# Altium PCB Chicker.PcbDoc
Units mil, origin at the board's own origin, x right, y up, seen from the top; angles counter-clockwise.
Board outline 5245 x 2500 mil, 2 copper layers (Top Layer, Bottom Layer); 27 components, 20 nets, 90 pads, 22 vias.
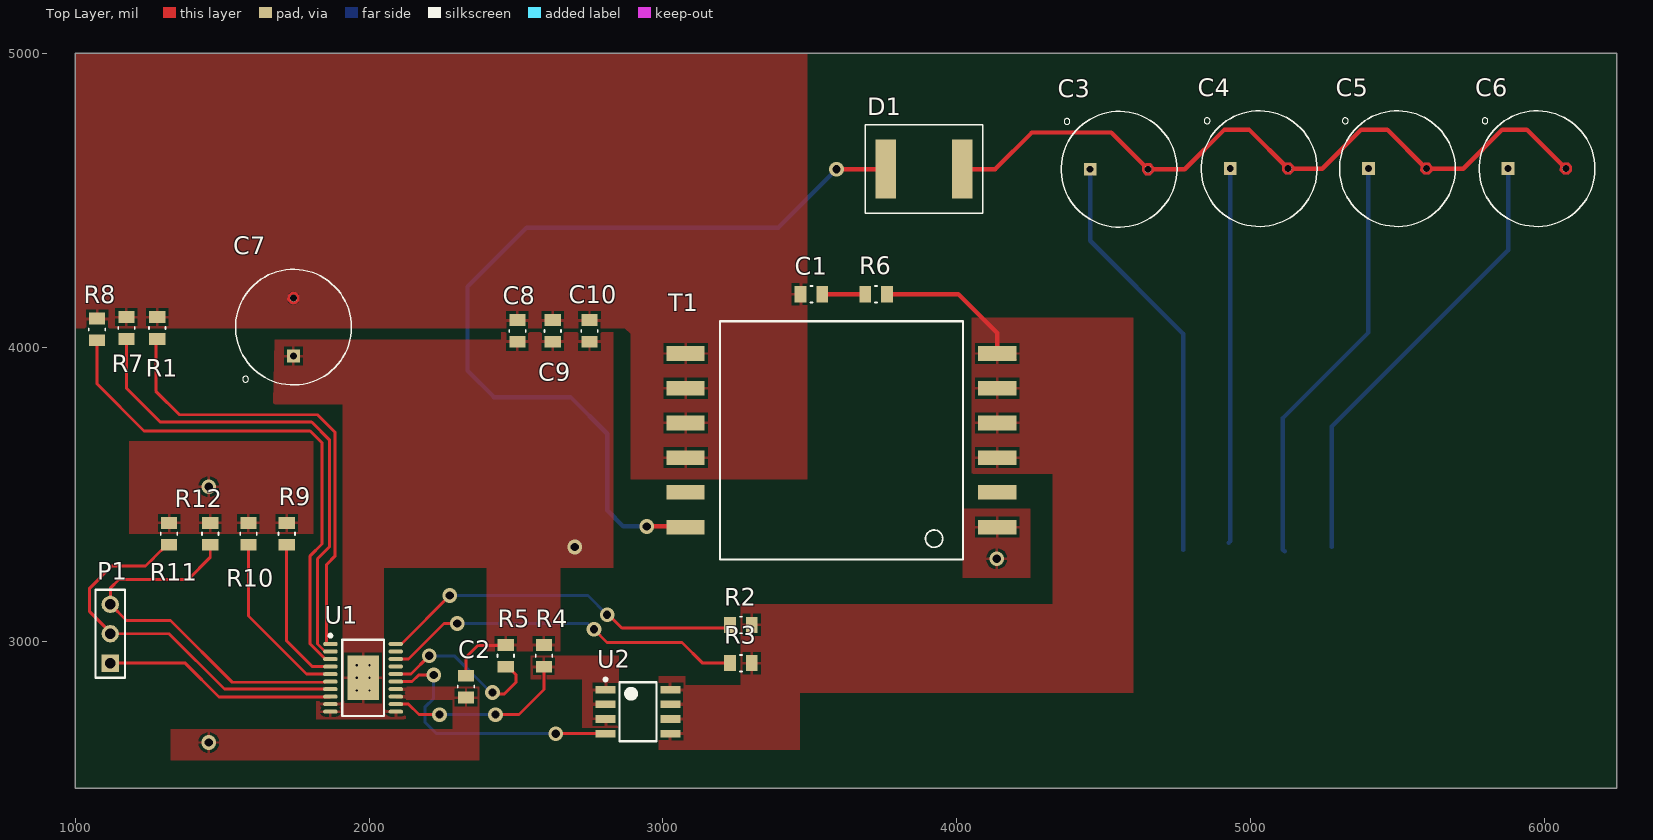
[diagram p0: Top Layer view]
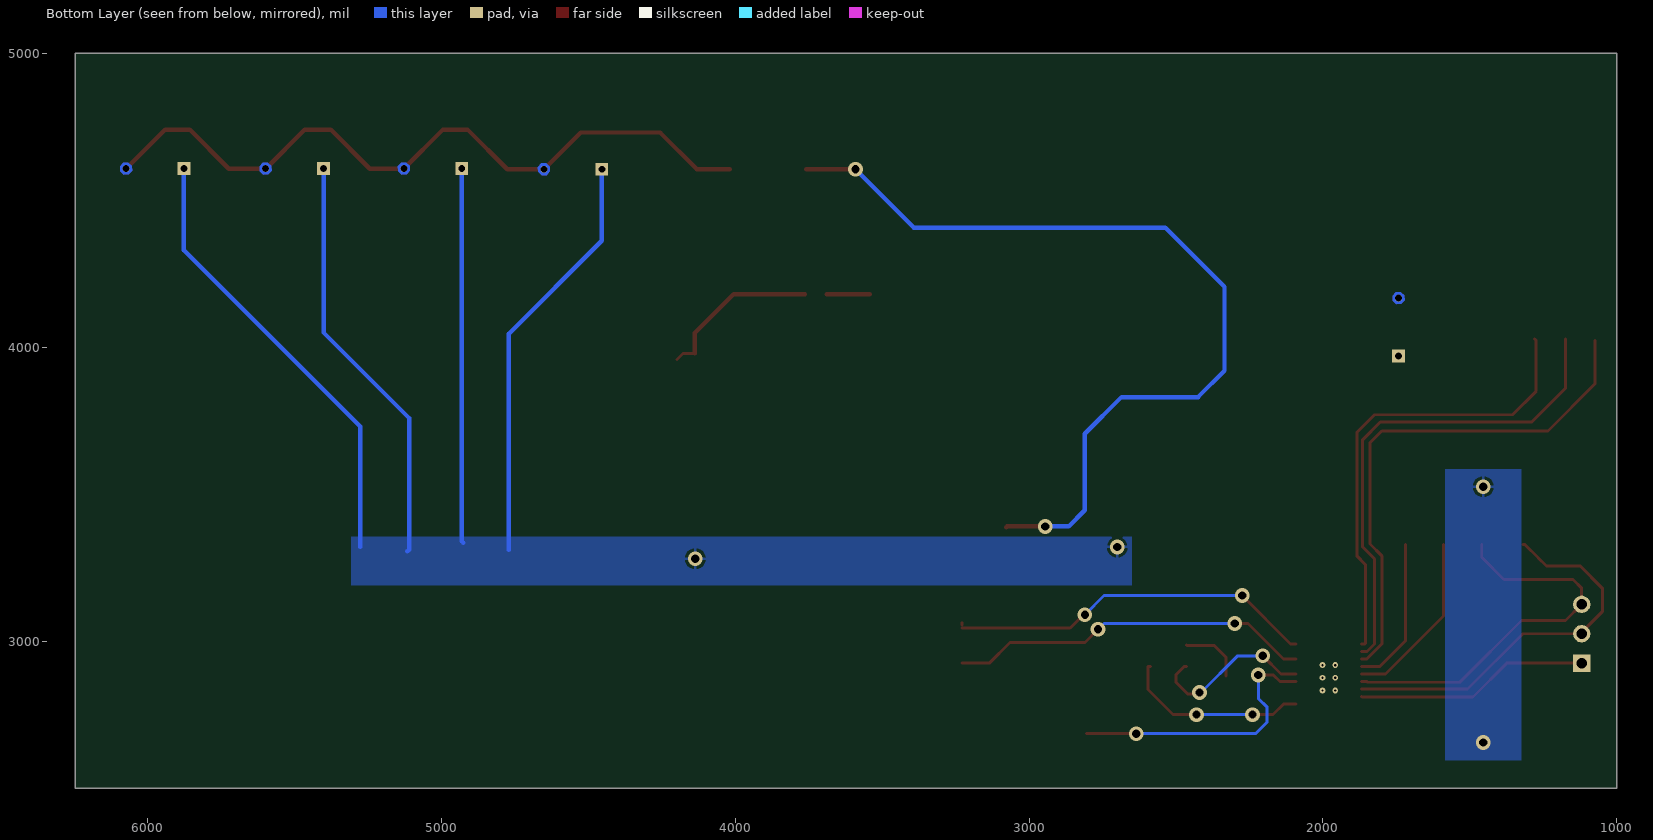
[diagram p1: Bottom Layer view, seen from below]

## Layer stack, top to bottom
Top Solder: solder mask 0.4, Solder Resist, Dk 3.5
Top Layer: signal copper 1.4
Dielectric 1: dielectric 12.6, FR-4, Dk 4.8
Bottom Layer: signal copper 1.4
Bottom Solder: solder mask 0.4, Solder Resist, Dk 3.5

## Board outline
1000,2500 6245,2500 6245,5000 1000,5000

## Design rules (kind name [scope] priority, off if disabled: settings)
Clearance [All] p1: gap=4 ignorepadtopadclearanceinfootprint=FALSE
PolygonConnect [All] p1: connectstyle=Relief reliefconductorwidth=10 reliefentries=4 polygonreliefangle="90 Angle" airgapwidth=10
RoutingVias [All] p1: holewidth=28 width=50 viastyle="Through Hole" minholewidth=28 minwidth=50 maxholewidth=28 maxwidth=50
SolderMaskExpansion [All] p1: expansion=4 istentingtop=FALSE
Width [All] p1: maxlimit=15 minlimit=4 preferedwidth=10
30 further rules are at their usual default settings.

## Components (designator, comment, footprint, x,y, rotation, side; value= is the part's Value field where it differs from the comment)
C1 "2.2uF" 0805 3505,4180 r180 top
C2 "10uF" 0805 2330,2845 r90 top
C3 "1000uF" "CAP POL 1000uF THRU" 4548.57,4603 r0 top
C4 "1000uF" "CAP POL 1000uF THRU" 5025,4605 r0 top
C5 "1000uF" "CAP POL 1000uF THRU" 5495,4605 r0 top
C6 "1000uF" "CAP POL 1000uF THRU" 5970,4605 r0 top
C7 "1000uF" "CAP POL 1000uF THRU" 1745,4065 r90 top
C8 "10uF" 0805 2505,4055 r270 top
C9 "10uF" 0805 2625,4055 r270 top
C10 "10uF" 0805 2750,4055 r270 top
D1 "ES3J" D0214-AB 3885,4610 r0 top
P1 "Header 3" HDR1X3 1120,2925 r90 top
R1 "25.5k" 0805 1280,4065 r270 top
R2 "11.5k" 0805 3265,3055 r180 top
R3 "25.5k" 0805 3265,2925 r180 top
R4 "16m" 0805 2595,2950 r90 top
R5 "1.05k" 0805 2465,2950 r90 top
R6 "100k" 0805 3725,4180 r0 top
R7 "174k" 0805 1175,4065 r90 top
R8 "255k" 0805 1075,4060 r90 top
R9 "374k" 0805 1720,3365 r90 top
R10 "495k" 0805 1590,3365 r90 top
R11 "100k" 0805 1320,3365 r90 top
R12 "100k" 0805 1460,3365 r90 top
T1 "DA2034" DA2034 3590,3705 r180 top
U1 "LT3751EFE#PBF" LT-FE-20-EPV-CB_L 1980,2875 r0 top
U2 "FDS2582" "8-SOIC MOSFET" 2915,2760 r0 top

## Footprints (in the part's own frame and the unit in brackets; to place one, negate y for a bottom-side part, rotate by r counter-clockwise, add the part's x,y. Pads: shape width x height; smd on the part's side, far side on the other; paste and mask are expansions set on the pad)
"8-SOIC MOSFET" [mm]
  rect 1.75x0.65 smd: D(2.8,-1.905) D(2.8,-0.635) D(2.8,0.635) D(2.8,1.905) G(-2.8,-1.905) S(-2.8,-0.635) S(-2.8,0.635) S(-2.8,1.905)
  silkscreen extent -2.92,-2.55 1.6,2.9, body extent -2,-2.55 2,2.55, height 1.7
0805 [mil]
  rect 40x55 smd: 1(-37,0) 2(37,0)
  silkscreen extent -4,-28 4,28
"CAP POL 1000uF THRU" [mm]
  rect 1.108x1.108 hole 0.6: NEG(-2.424,0.051)
  round 0.6 hole 0.6: POS(2.576,0.051)
  Top Layer region: 3.097,0.24 2.81,0.553 2.387,0.571 2.074,0.285 2.056,-0.139 2.342,-0.451 2.766,-0.47 3.078,-0.183
  Bottom Layer region: 3.097,0.24 2.81,0.553 2.387,0.571 2.074,0.285 2.056,-0.139 2.342,-0.451 2.766,-0.47 3.078,-0.183
  Multi-Layer region: 3.097,0.24 2.81,0.553 2.387,0.571 2.074,0.285 2.056,-0.139 2.342,-0.451 2.766,-0.47 3.078,-0.183
  silkscreen extent -4.92,-4.95 5.08,5.05
D0214-AB [mil]
  rect 70x200 smd: IN(-126.89,-4.41) OUT(133.11,-4.41)
  silkscreen extent -197,-154 203,146
DA2034 [mm]
  rect 3.3x1.27 smd: 1(-13.892,8.059) 2(-13.892,5.059) 3(-13.892,2.059) 4(-13.892,-0.941) 5(-13.892,-3.941) 6(-13.892,-6.941) 7(13.028,-6.941) 8(13.028,-3.941) 9(13.028,-0.941) 10(13.028,2.059) 11(13.028,5.059) 12(13.028,8.059)
  silkscreen extent -10.93,-9.73 10.07,10.85
HDR1X3 [mm] "Connector; Header; 3 Position"
  rect 1.5x1.5 hole 0.9: 1(0,0)
  round 1.5 hole 0.9: 2(2.54,0) 3(5.08,0)
  silkscreen extent -1.27,-1.27 6.35,1.27
LT-FE-20-EPV-CB_L [mm] "SOP, 20-Leads, Body 6.6x4.5mm, Pitch 0.65mm, Thermal Pad 3.86x2.74mm, IPC High Density"
  oval 1.25x0.35 smd: 1(-2.825,2.925) 2(-2.825,2.275) 3(-2.825,1.625) 4(-2.825,0.975) 5(-2.825,0.325) 6(-2.825,-0.325) 7(-2.825,-0.975) 8(-2.825,-1.625) 9(-2.825,-2.275) 10(-2.825,-2.925) 11(2.825,-2.925) 12(2.825,-2.275) 13(2.825,-1.625) 14(2.825,-0.975) 15(2.825,-0.325) 16(2.825,0.325) 17(2.825,0.975) 18(2.825,1.625) 19(2.825,2.275) 20(2.825,2.925)
  rect 2.74x3.86 smd: 21(0,0)
  silkscreen extent -2.95,-3.3 1.8,3.77, body extent -2.25,-3.3 2.25,3.3, height 1.2

## Part data
C1: library part "CAP 2.2uF 0805", "CAP CER 1UF 50V X7R 0805", Package=0805, Rating=16V, Tolerance=10%, Digikey=399-3523-1-ND, Digikey Link=https://www.digikey.ca/products/en?keywords=399-3523-1-ND, MF=KEMET, MP=C0805C225K4RACTU, Price="0,461 CAD"
C2 C8 C9 C10: library part "CAP 10uF 0805", "CAP CER 10UF 10V X5R 0805", Package=0805, Rating=10V, Tolerance=10%, Digikey=399-4925-1-ND, Digikey Link=https://www.digikey.ca/product-detail/en/kemet/C0805C106K8PACTU/399-4925-1-ND/1090920, MF=KEMET, MP=C0805C106K8PACTU, Price="0.168 CAD"
C3 C4 C5 C6 C7: library part "CAP POL 1000uF THRU", "NICHICON   UVR1E102MPD1TD   ALUMINUM ELECTROLYTIC CAPACITOR, 1000UF, 25V, 20%, RADIAL, FULL REEL", Capacitance=1mF, Case/Package=Radial, Dielectric Material=Aluminium, Leakage Current=750uA, Manufacturer=Nichicon, Manufacturer Part Number=UVR1E102MPD1TD, Max Operating Temperature=85°C, Min Operating Temperature=-40°C, Package Quantity=500, Ripple Current=960mA, Supplier Part Number 1=493-5913-1-ND, Tolerance=20%, Voltage=25V, Category="Aluminum Electrolytic Capacitors", ComponentLink1Description=https://datasheet.ciiva.com/7851/e-vr-7851718.pdf?src-supplier=Element14, ComponentLink1URL=https://datasheet.ciiva.com/7851/e-vr-7851718.pdf?src-supplier=Element14, ComponentLink2Description=https://datasheet.ciiva.com/6300/e-vr-6300009.pdf?src-supplier=Digi-Key, ComponentLink2URL=https://datasheet.ciiva.com/6300/e-vr-6300009.pdf?src-supplier=Digi-Key, ComponentLink3Description=https://datasheet.ciiva.com/6300/e-vr-6300010.pdf?src-supplier=Digi-Key, ComponentLink3URL=https://datasheet.ciiva.com/6300/e-vr-6300010.pdf?src-supplier=Digi-Key, ComponentLink4Description=https://datasheet.ciiva.com/11684/e-vr-11684106.pdf?src-supplier=Avnet, ComponentLink4URL=https://datasheet.ciiva.com/11684/e-vr-11684106.pdf?src-supplier=Avnet, ComponentLink5Description=https://datasheet.ciiva.com/16502/e-vr-16502813.pdf?src-supplier=Future+Electronics, ComponentLink5URL=https://datasheet.ciiva.com/16502/e-vr-16502813.pdf?src-supplier=Future+Electronics, ComponentLink6Description=https://datasheet.ciiva.com/46381/1909356-46381757.pdf?src-supplier=Element14, ComponentLink6URL=https://datasheet.ciiva.com/46381/1909356-46381757.pdf?src-supplier=Element14, Diameter=10mm, Dissipation Factor=0.16%, Height=20mm, Height - Seated (Max)=0.866inch, Lead Diameter=0.6mm, Lead Free="Lead Free", Lead Pitch=5mm, Length=20mm, Life (Hours)=2000Hour, Mount="Through Hole,PCB", Number of Pins=2, Packaging="Tape and Reel", Pricing 1="1=0.58000, 10=0.40800, 100=0.26890 (USD)", Radiation Hardening=No, REACH SVHC="No SVHC", RoHS=Yes, Stock 1=43448, Supplier 1=Digi-Key, Termination=Radial, Voltage Rating=25V, Voltage Rating (DC)=25V
D1: "Diode Switching 600V 3A 2-Pin DO-214AB T/R", Average Rectified Current=3A, Capacitance=45pF, Case/Package=SMC, Forward Voltage=1.7V, Manufacturer="ON Semiconductor / Fairchild", Max Forward Surge Current (Ifsm)=100A, Max Operating Temperature=150°C, Max Repetitive Reverse Voltage (Vrrm)=600V, Min Operating Temperature=-50°C, Package Quantity=3000, Peak Reverse Current=10uA, Power Dissipation=1.66W, Supplier Part Number 1=ES3JCT-ND, Category="Zener Diodes", ComponentLink1Description=https://datasheet.ciiva.com/4452/es3j-187547-4452440.pdf?src-supplier=Mouser, ComponentLink1URL=https://datasheet.ciiva.com/4452/es3j-187547-4452440.pdf?src-supplier=Mouser, ComponentLink2Description=https://datasheet.ciiva.com/30479/0900766b810e1d0b-30479500.pdf?src-supplier=RSComponents, ComponentLink2URL=https://datasheet.ciiva.com/30479/0900766b810e1d0b-30479500.pdf?src-supplier=RSComponents, ComponentLink3Description=https://datasheet.ciiva.com/22651/1856389-22651960.pdf?src-supplier=Element14, ComponentLink3URL=https://datasheet.ciiva.com/22651/1856389-22651960.pdf?src-supplier=Element14, ComponentLink4Description=https://datasheet.ciiva.com/26230/es3j-26230952.pdf?src-supplier=Avnet+Europe, ComponentLink4URL=https://datasheet.ciiva.com/26230/es3j-26230952.pdf?src-supplier=Avnet+Europe, ComponentLink5Description=https://datasheet.ciiva.com/911/es3a-911003.pdf?src-supplier=Digi-Key, ComponentLink5URL=https://datasheet.ciiva.com/911/es3a-911003.pdf?src-supplier=Digi-Key, ComponentLink6Description=https://datasheet.ciiva.com/911/es3a-911004.pdf?src-supplier=Digi-Key, ComponentLink6URL=https://datasheet.ciiva.com/911/es3a-911004.pdf?src-supplier=Digi-Key, ComponentLink7Description=https://datasheet.ciiva.com/23683/1856389-23683564.pdf?src-supplier=Newark, ComponentLink7URL=https://datasheet.ciiva.com/23683/1856389-23683564.pdf?src-supplier=Newark, ComponentLink8Description=https://datasheet.ciiva.com/17194/es3j-17194703.pdf?src-supplier=Future+Electronics, ComponentLink8URL=https://datasheet.ciiva.com/17194/es3j-17194703.pdf?src-supplier=Future+Electronics, ComponentLink9Description=https://datasheet.ciiva.com/7965/1856389-7965165.pdf?src-supplier=Element14, ComponentLink9URL=https://datasheet.ciiva.com/7965/1856389-7965165.pdf?src-supplier=Element14, ComponentLink10Description=https://datasheet.ciiva.com/8300/es3j-8300861.pdf?src-supplier=Avnet, ComponentLink10URL=https://datasheet.ciiva.com/8300/es3j-8300861.pdf?src-supplier=Avnet, Contact Plating=Tin,Matte, Current=3A, Current Rating=3A, Element Configuration=Single, Forward Current=3A, Height=2.616mm, Lead Free="Lead Free", Length=7.11mm, Manufacturer Part Number=ES3J, Max Reverse Voltage (DC)=600V, Max Surge Current=100A, Mount="Surface Mount", Number of Pins=2, Output Current=3A, Packaging="Tape and Reel", Peak Non-Repetitive Surge Current=100A, Polarity=Standard, Pricing 1="1=0.47000, 10=0.37800, 25=0.34600, 100=0.21740, 250=0.21492, 500=0.20126, 1000=0.13685 (USD)", Radiation Hardening=No, REACH SVHC="No SVHC", Recovery Time=35ns, Reverse Recovery Time=35ns, Reverse Voltage=600V, RoHS=Yes, Stock 1=20740, Supplier 1=Digi-Key, Voltage=600V, Voltage Rating (DC)=600V, Width=6.223mm
P1: "Header, 3-Pin", LatestRevisionDate=17-Jul-2002, LatestRevisionNote="Re-released for DXP Platform.", Publisher="Altium Limited"
R1 R3: library part "RES 25.5k 0805", "0805 Resistor, 6A, 0.125W, 25ppm, 0.1%, 25K5", Case Code (Imperial)=0805, Case Code (Metric)=2012, Manufacturer=Panasonic, Manufacturer Part Number=ERA-6AEB2552V, Max Operating Temperature=155°C, Max Power Dissipation=125mW, Min Operating Temperature=-55°C, Package Quantity=1, Resistance=25.5kR, Supplier Part Number 1=P25.5KDACT-ND, Temperature Coefficient=25ppm/°C, Tolerance=0.1%, Voltage Rating=100V, Case/Package=0805, Category="Chip SMD Resistors", ComponentLink1Description=https://datasheet.ciiva.com/11810/0900766b80eb1d8c-11810651.pdf?src-supplier=RSComponents, ComponentLink1URL=https://datasheet.ciiva.com/11810/0900766b80eb1d8c-11810651.pdf?src-supplier=RSComponents, ComponentLink2Description=https://datasheet.ciiva.com/26335/459526-da-01-en-widerstand-0805-era-26335831.pdf?src-supplier=Conrad, ComponentLink2URL=https://datasheet.ciiva.com/26335/459526-da-01-en-widerstand-0805-era-26335831.pdf?src-supplier=Conrad, ComponentLink3Description=https://datasheet.ciiva.com/7870/485442-7870651.pdf?src-supplier=Element14, ComponentLink3URL=https://datasheet.ciiva.com/7870/485442-7870651.pdf?src-supplier=Element14, ComponentLink4Description=https://datasheet.ciiva.com/5987/485442-5987308.pdf?src-supplier=Farnell, ComponentLink4URL=https://datasheet.ciiva.com/5987/485442-5987308.pdf?src-supplier=Farnell, ComponentLink5Description=https://datasheet.ciiva.com/7870/485442-7870652.pdf?src-supplier=Element14, ComponentLink5URL=https://datasheet.ciiva.com/7870/485442-7870652.pdf?src-supplier=Element14, ComponentLink6Description=https://datasheet.ciiva.com/30151/54aoa0000ce26-30151583.pdf?src-supplier=Onlinecomponents.com, ComponentLink6URL=https://datasheet.ciiva.com/30151/54aoa0000ce26-30151583.pdf?src-supplier=Onlinecomponents.com, ComponentLink7Description=https://datasheet.ciiva.com/9191/aoa0000ce26-9191422.pdf?src-supplier=Avnet, ComponentLink7URL=https://datasheet.ciiva.com/9191/aoa0000ce26-9191422.pdf?src-supplier=Avnet, Composition="Metal Film,Thin Film", Contact Plating=Tin, Depth=1.25mm, Features="Automotive AEC-Q200", Height=0.5mm, Lead Free="Lead Free", Length=2mm, Military Standard=Not, Mount="Surface Mount", Number of Pins=2, Number of Terminations=2, Packaging="Tape and Reel", Power Rating=125mW, Pricing 1="1=0.36000, 10=0.30200, 100=0.11820, 1000=0.04948, 2500=0.04536 (USD)", Radiation Hardening=No, RoHS=Yes, Stock 1=5872, Supplier 1=Digi-Key, Termination=Solder, Voltage Rating (DC)=100V, Width=1.25mm
R2: library part "RES 11.5k 0805", "Res Thin Film 0805 11.5K Ohm 0.1% 1/8W 25ppm/C Molded SMD SMD Punched Carrier T/R", Case Code (Imperial)=0805, Case Code (Metric)=2012, Manufacturer=Panasonic, Manufacturer Part Number=ERA-6AEB1152V, Max Operating Temperature=155°C, Max Power Dissipation=125mW, Min Operating Temperature=-55°C, Package Quantity=1, Resistance=11.5kR, Supplier Part Number 1=P11.5KDACT-ND, Temperature Coefficient=25ppm/°C, Tolerance=0.1%, Voltage Rating=100V, Case/Package=0805, Category="Chip SMD Resistors", ComponentLink1Description=https://datasheet.ciiva.com/11810/0900766b80eb1d8c-11810868.pdf?src-supplier=RSComponents, ComponentLink1URL=https://datasheet.ciiva.com/11810/0900766b80eb1d8c-11810868.pdf?src-supplier=RSComponents, ComponentLink2Description=https://datasheet.ciiva.com/41450/001181306-da-01-en-widerstand-era-0805-11k5-0-1-5000st-41450464.pdf?src-supplier=Conrad, ComponentLink2URL=https://datasheet.ciiva.com/41450/001181306-da-01-en-widerstand-era-0805-11k5-0-1-5000st-41450464.pdf?src-supplier=Conrad, ComponentLink3Description=https://datasheet.ciiva.com/5987/485442-5987301.pdf?src-supplier=Farnell, ComponentLink3URL=https://datasheet.ciiva.com/5987/485442-5987301.pdf?src-supplier=Farnell, ComponentLink4Description=https://datasheet.ciiva.com/7829/485442-7829142.pdf?src-supplier=Element14, ComponentLink4URL=https://datasheet.ciiva.com/7829/485442-7829142.pdf?src-supplier=Element14, ComponentLink5Description=https://datasheet.ciiva.com/17211/aoa0000ce26-17211855.pdf?src-supplier=Avnet+Europe, ComponentLink5URL=https://datasheet.ciiva.com/17211/aoa0000ce26-17211855.pdf?src-supplier=Avnet+Europe, ComponentLink6Description=https://datasheet.ciiva.com/7829/485442-7829143.pdf?src-supplier=Element14, ComponentLink6URL=https://datasheet.ciiva.com/7829/485442-7829143.pdf?src-supplier=Element14, ComponentLink7Description=https://datasheet.ciiva.com/9193/aoa0000ce26-9193735.pdf?src-supplier=Avnet, ComponentLink7URL=https://datasheet.ciiva.com/9193/aoa0000ce26-9193735.pdf?src-supplier=Avnet, ComponentLink8Description=https://datasheet.ciiva.com/24024/aoa0000ce26-197354-24024328.pdf?src-supplier=Mouser, ComponentLink8URL=https://datasheet.ciiva.com/24024/aoa0000ce26-197354-24024328.pdf?src-supplier=Mouser, Composition="Thin Film,Metal Film", Contact Plating=Tin, Depth=1.25mm, Features="Automotive AEC-Q200", Height=0.5mm, Lead Free="Lead Free", Length=2mm, Military Standard=Not, Mount="Surface Mount", Number of Pins=2, Number of Terminations=2, Packaging="Tape and Reel", Power Rating=125mW, Pricing 1="1=0.34000, 10=0.28800, 100=0.11260, 1000=0.04712, 2500=0.04320 (USD)", Radiation Hardening=No, RoHS=Yes, Stock 1=10661, Supplier 1=Digi-Key, Termination=Solder, Voltage Rating (DC)=100V, Width=1.25mm
R4: library part "RES 16mOhm 0805", "Res Thick Film 0805 0.016 Ohm 1% 0.5W(1/2W) ±200ppm/C Molded SMD Automotive Punched T/R", Case Code (Imperial)=0805, Case Code (Metric)=2012, Manufacturer=Panasonic, Manufacturer Part Number=ERJ-6BWFR016V, Max Operating Temperature=155°C, Max Power Dissipation=500mW, Min Operating Temperature=-55°C, Package Quantity=1, Resistance=16mR, Supplier Part Number 1=P.016AQCT-ND, Temperature Coefficient=200ppm/°C, Tolerance=1%, Case/Package=0805, Category="Chip SMD Resistors", ComponentLink1Description=https://datasheet.ciiva.com/11808/0900766b8126441d-11808690.pdf?src-supplier=RSComponents, ComponentLink1URL=https://datasheet.ciiva.com/11808/0900766b8126441d-11808690.pdf?src-supplier=RSComponents, ComponentLink2Description=https://datasheet.ciiva.com/2452/aoa0000ce3-2452594.pdf?src-supplier=Digi-Key, ComponentLink2URL=https://datasheet.ciiva.com/2452/aoa0000ce3-2452594.pdf?src-supplier=Digi-Key, ComponentLink3Description=https://datasheet.ciiva.com/2452/aoa0000ce3-2452592.pdf?src-supplier=Digi-Key, ComponentLink3URL=https://datasheet.ciiva.com/2452/aoa0000ce3-2452592.pdf?src-supplier=Digi-Key, ComponentLink4Description=https://datasheet.ciiva.com/2452/aoa0000ce3-2452593.pdf?src-supplier=Digi-Key, ComponentLink4URL=https://datasheet.ciiva.com/2452/aoa0000ce3-2452593.pdf?src-supplier=Digi-Key, ComponentLink5Description=https://datasheet.ciiva.com/9192/aoa0000ce3-9192761.pdf?src-supplier=Avnet, ComponentLink5URL=https://datasheet.ciiva.com/9192/aoa0000ce3-9192761.pdf?src-supplier=Avnet, ComponentLink6Description=https://datasheet.ciiva.com/17211/aoa0000ce3-17211370.pdf?src-supplier=Avnet+Europe, ComponentLink6URL=https://datasheet.ciiva.com/17211/aoa0000ce3-17211370.pdf?src-supplier=Avnet+Europe, Composition="Thick Film", Contact Plating=Tin, Depth=1.25mm, Features="Automotive AEC-Q200", Height=0.028inch, Lead Free="Lead Free", Length=2mm, Military Standard=Not, Mount="Surface Mount", Number of Pins=2, Number of Terminations=2, Packaging="Tape and Reel", Power Rating=500mW, Pricing 1="1=0.65000, 10=0.53800, 100=0.36140, 1000=0.21148, 2500=0.20917 (USD)", Radiation Hardening=No, RoHS=Yes, Stock 1=4585, Supplier 1=Digi-Key, Termination=SMD/SMT, Width=0.049inch
R5: library part "RES 1.05k 0805", "Res Thin Film 0805 10.5K Ohm 0.1% 0.125W(1/8W) ±25ppm/C Molded SMD Automotive Punched T/R", Case Code (Imperial)=0805, Case Code (Metric)=2012, Manufacturer=Panasonic, Manufacturer Part Number=ERA-6AEB1052V, Max Operating Temperature=155°C, Max Power Dissipation=125mW, Min Operating Temperature=-55°C, Package Quantity=1, Resistance=10.5kR, Supplier Part Number 1=P10.5KDACT-ND, Temperature Coefficient=25ppm/°C, Tolerance=0.1%, Voltage Rating=100V, Case/Package=0805, Category="Chip SMD Resistors", ComponentLink1Description=https://datasheet.ciiva.com/11810/0900766b80eb1d8c-11810443.pdf?src-supplier=RSComponents, ComponentLink1URL=https://datasheet.ciiva.com/11810/0900766b80eb1d8c-11810443.pdf?src-supplier=RSComponents, ComponentLink2Description=https://datasheet.ciiva.com/41450/001181303-da-01-en-widerstand-era-0805-10k5-0-1-5000st-41450463.pdf?src-supplier=Conrad, ComponentLink2URL=https://datasheet.ciiva.com/41450/001181303-da-01-en-widerstand-era-0805-10k5-0-1-5000st-41450463.pdf?src-supplier=Conrad, ComponentLink3Description=https://datasheet.ciiva.com/5987/485442-5987261.pdf?src-supplier=Farnell, ComponentLink3URL=https://datasheet.ciiva.com/5987/485442-5987261.pdf?src-supplier=Farnell, ComponentLink4Description=https://datasheet.ciiva.com/17211/aoa0000ce26-17211965.pdf?src-supplier=Avnet+Europe, ComponentLink4URL=https://datasheet.ciiva.com/17211/aoa0000ce26-17211965.pdf?src-supplier=Avnet+Europe, ComponentLink5Description=https://datasheet.ciiva.com/9194/aoa0000ce26-9194028.pdf?src-supplier=Avnet, ComponentLink5URL=https://datasheet.ciiva.com/9194/aoa0000ce26-9194028.pdf?src-supplier=Avnet, ComponentLink6Description=https://datasheet.ciiva.com/5987/485442-5987263.pdf?src-supplier=Farnell, ComponentLink6URL=https://datasheet.ciiva.com/5987/485442-5987263.pdf?src-supplier=Farnell, Composition="Thin Film,Metal Film", Contact Plating=Tin, Depth=1.25mm, Features="Automotive AEC-Q200", Height=0.5mm, Lead Free="Lead Free", Length=2mm, Military Standard=Not, Mount="Surface Mount", Number of Pins=2, Number of Terminations=2, Packaging="Tape and Reel", Power Rating=125mW, Pricing 1="1=0.34000, 10=0.28800, 100=0.11260, 1000=0.04712, 2500=0.04320 (USD)", Radiation Hardening=No, REACH SVHC="No SVHC", RoHS=Yes, Stock 1=21208, Supplier 1=Digi-Key, Termination=Solder, Voltage Rating (DC)=100V, Width=1.25mm
R6 R11 R12: library part "RES 100k 0805", "RES SMD 100K OHM 1% 1/8W 0805", Package=0805, Rating=0.125W, Tolerance=1%, Digikey=311-100KCRCT-ND, Digikey Link=https://www.digikey.ca/products/en?keywords=311-100KCRCT-ND, MF=Yageo, MP=RC0805FR-07100KL, Price="0.058 CAD"
R7: library part "RES 174k 0805", "RES SMD 174K OHM 1% 1/8W 0805", Case Code (Imperial)=0805, Case Code (Metric)=2012, Manufacturer=Yageo, Manufacturer Part Number=RC0805FR-07174KL, Max Operating Temperature=155°C, Max Power Dissipation=125mW, Min Operating Temperature=-55°C, Package Quantity=1, Resistance=174kR, Supplier Part Number 1=311-174KCRCT-ND, Temperature Coefficient=100ppm/°C, Tolerance=1%, Voltage Rating=150V, Case/Package=0805, Category="Chip SMD Resistors", ComponentLink1Description=https://datasheet.ciiva.com/2509/pyu-r-int-thick-7-2509472.pdf?src-supplier=Digi-Key, ComponentLink1URL=https://datasheet.ciiva.com/2509/pyu-r-int-thick-7-2509472.pdf?src-supplier=Digi-Key, ComponentLink2Description=https://datasheet.ciiva.com/2509/pyu-r-int-thick-7-2509471.pdf?src-supplier=Digi-Key, ComponentLink2URL=https://datasheet.ciiva.com/2509/pyu-r-int-thick-7-2509471.pdf?src-supplier=Digi-Key, ComponentLink3Description=https://datasheet.ciiva.com/2509/pyu-r-int-thick-7-2509473.pdf?src-supplier=Digi-Key, ComponentLink3URL=https://datasheet.ciiva.com/2509/pyu-r-int-thick-7-2509473.pdf?src-supplier=Digi-Key, Composition="Thick Film", Contact Plating=Tin,Matte, Depth=1.25mm, Features="Moisture Resistant", Height=0.024inch, Lead Free="Lead Free", Length=2mm, Military Standard=Not, Number of Terminations=2, Packaging="Tape and Reel", Power Rating=125mW, Pricing 1="1=0.10000, 10=0.04000, 100=0.01630, 1000=0.00731, 2500=0.00635 (USD)", Radiation Hardening=No, RoHS=Yes, Stock 1=27863, Supplier 1=Digi-Key, Termination=SMD/SMT, Voltage Rating (DC)=150V, Width=0.049inch
R8: library part "RES 255k 0805", "0805 Resistor, 6A, 0.125W, 25ppm, 0.1%, 255K", Case Code (Imperial)=0805, Case Code (Metric)=2012, Manufacturer=Panasonic, Manufacturer Part Number=ERA-6AEB2553V, Max Operating Temperature=155°C, Max Power Dissipation=125mW, Min Operating Temperature=-55°C, Package Quantity=1, Resistance=255kR, Supplier Part Number 1=P255KDACT-ND, Temperature Coefficient=25ppm/°C, Tolerance=0.1%, Voltage Rating=200V, Voltage Rating (DC)=100V, Case/Package=0805, Category="Chip SMD Resistors", ComponentLink1Description=https://datasheet.ciiva.com/11810/0900766b80eb1d8c-11810615.pdf?src-supplier=RSComponents, ComponentLink1URL=https://datasheet.ciiva.com/11810/0900766b80eb1d8c-11810615.pdf?src-supplier=RSComponents, ComponentLink2Description=https://datasheet.ciiva.com/41450/001181380-da-01-en-widerstand-era-0805-255k-0-1-5000st-41450539.pdf?src-supplier=Conrad, ComponentLink2URL=https://datasheet.ciiva.com/41450/001181380-da-01-en-widerstand-era-0805-255k-0-1-5000st-41450539.pdf?src-supplier=Conrad, ComponentLink3Description=https://datasheet.ciiva.com/5981/485442-5981317.pdf?src-supplier=Farnell, ComponentLink3URL=https://datasheet.ciiva.com/5981/485442-5981317.pdf?src-supplier=Farnell, ComponentLink4Description=https://datasheet.ciiva.com/5981/485442-5981318.pdf?src-supplier=Farnell, ComponentLink4URL=https://datasheet.ciiva.com/5981/485442-5981318.pdf?src-supplier=Farnell, ComponentLink5Description=https://datasheet.ciiva.com/5981/485442-5981319.pdf?src-supplier=Farnell, ComponentLink5URL=https://datasheet.ciiva.com/5981/485442-5981319.pdf?src-supplier=Farnell, ComponentLink6Description=https://datasheet.ciiva.com/5981/485442-5981320.pdf?src-supplier=Farnell, ComponentLink6URL=https://datasheet.ciiva.com/5981/485442-5981320.pdf?src-supplier=Farnell, ComponentLink7Description=https://datasheet.ciiva.com/17206/aoa0000ce26-17206655.pdf?src-supplier=Avnet+Europe, ComponentLink7URL=https://datasheet.ciiva.com/17206/aoa0000ce26-17206655.pdf?src-supplier=Avnet+Europe, Composition="Metal Film,Thin Film", Contact Plating=Tin, Depth=1.25mm, Features="Automotive AEC-Q200", Height=0.5mm, Lead Free="Lead Free", Length=2mm, Military Standard=Not, Mount="Surface Mount", Number of Pins=2, Number of Terminations=2, Packaging="Tape and Reel", Power Rating=125mW, Pricing 1="1=0.36000, 10=0.30200, 100=0.11820, 1000=0.04948, 2500=0.04536 (USD)", Radiation Hardening=No, REACH SVHC="No SVHC", RoHS=Yes, Stock 1=7869, Supplier 1=Digi-Key, Termination=SMD/SMT, Weight=0.000194oz, Width=1.25mm
R9: library part "RES 374k 0805", "0805 Resistor, 6A, 0.125W, 25ppm, 0.1%, 374K", Case Code (Imperial)=0805, Case Code (Metric)=2012, Manufacturer=Panasonic, Manufacturer Part Number=ERA-6AEB3743V, Max Operating Temperature=155°C, Max Power Dissipation=125mW, Min Operating Temperature=-55°C, Package Quantity=5000, Resistance=374kR, Supplier Part Number 1=P374KDACT-ND, Temperature Coefficient=25ppm/°C, Tolerance=0.1%, Voltage Rating=100V, Case/Package=0805, Category="Chip SMD Resistors", ComponentLink1Description=https://datasheet.ciiva.com/11810/0900766b80eb1d8c-11810612.pdf?src-supplier=RSComponents, ComponentLink1URL=https://datasheet.ciiva.com/11810/0900766b80eb1d8c-11810612.pdf?src-supplier=RSComponents, ComponentLink2Description=https://datasheet.ciiva.com/41450/001181392-da-01-en-widerstand-era-0805-374k-0-1-5000st-41450550.pdf?src-supplier=Conrad, ComponentLink2URL=https://datasheet.ciiva.com/41450/001181392-da-01-en-widerstand-era-0805-374k-0-1-5000st-41450550.pdf?src-supplier=Conrad, ComponentLink3Description=https://datasheet.ciiva.com/17206/aoa0000ce26-17206008.pdf?src-supplier=Avnet+Europe, ComponentLink3URL=https://datasheet.ciiva.com/17206/aoa0000ce26-17206008.pdf?src-supplier=Avnet+Europe, ComponentLink4Description=https://datasheet.ciiva.com/6001/485442-6001717.pdf?src-supplier=Farnell, ComponentLink4URL=https://datasheet.ciiva.com/6001/485442-6001717.pdf?src-supplier=Farnell, ComponentLink5Description=https://datasheet.ciiva.com/9182/aoa0000ce26-9182549.pdf?src-supplier=Avnet, ComponentLink5URL=https://datasheet.ciiva.com/9182/aoa0000ce26-9182549.pdf?src-supplier=Avnet, ComponentLink6Description=https://datasheet.ciiva.com/6001/485442-6001718.pdf?src-supplier=Farnell, ComponentLink6URL=https://datasheet.ciiva.com/6001/485442-6001718.pdf?src-supplier=Farnell, ComponentLink7Description=https://datasheet.ciiva.com/7753/485442-7753884.pdf?src-supplier=Element14, ComponentLink7URL=https://datasheet.ciiva.com/7753/485442-7753884.pdf?src-supplier=Element14, ComponentLink8Description=https://datasheet.ciiva.com/7753/485442-7753885.pdf?src-supplier=Element14, ComponentLink8URL=https://datasheet.ciiva.com/7753/485442-7753885.pdf?src-supplier=Element14, Composition="Thin Film,Metal Film", Contact Plating=Tin, Depth=1.25mm, Features="Automotive AEC-Q200", Height=0.5mm, Lead Free="Lead Free", Length=2mm, Mount="Surface Mount", Number of Pins=2, Number of Terminations=2, Packaging="Tape and Reel", Power Rating=125mW, Pricing 1="1=0.34000, 10=0.28800, 100=0.11260, 1000=0.04712, 2500=0.04320 (USD)", Radiation Hardening=No, RoHS=Yes, Stock 1=10062, Supplier 1=Digi-Key, Termination=Solder, Voltage Rating (DC)=100V, Width=1.25mm
R10: library part "RES 495k 0805", "RES SMD 499K OHM 1% 1/8W 0805", Case Code (Imperial)=0805, Case Code (Metric)=2012, Manufacturer=Yageo, Manufacturer Part Number=RC0805FR-07499KL, Max Operating Temperature=155°C, Min Operating Temperature=-55°C, Power Rating=125mW, Resistance=499kR, Supplier Part Number 1=311-499KCRCT-ND, Temperature Coefficient=100ppm/°C, Tolerance=1%, Voltage Rating=150V, Case/Package=0805, Category="Chip SMD Resistors", ComponentLink1Description=https://datasheet.ciiva.com/15189/getdatasheetpartid-326570-15189975.pdf?src-supplier=Verical, ComponentLink1URL=https://datasheet.ciiva.com/15189/getdatasheetpartid-326570-15189975.pdf?src-supplier=Verical, Composition="Thick Film", Contact Plating=Tin,Lead,Matte, Depth=1.25mm, Lead Free="Lead Free", Length=2mm, Military Standard=Not, Packaging="Tape and Reel", Pricing 1="1=0.10000, 10=0.04000, 100=0.01630, 1000=0.00731, 2500=0.00635 (USD)", Radiation Hardening=No, RoHS=Yes, Stock 1=2275, Supplier 1=Digi-Key, Termination=SMD/SMT, Voltage Rating (DC)=150V
T1: "Audio Transformers / Signal Transformers DA2032 Cap Chrgr For Linear LT3750/51"
U1: "Controller to 20-Pin TSSOP EP", Case/Package=TSSOP, Manufacturer="Analog Devices / Linear Technology", Max Input Voltage=24V, Max Operating Temperature=125°C, Min Operating Temperature=-40°C, Min Supply Voltage=4.75V, Operating Supply Current=5.5mA, Output Current=150mA, Output Voltage=500V, Package Quantity=74, Category="Voltage Regulators - Switching", ComponentLink1Description=https://datasheet.ciiva.com/15104/getdatasheetpartid-472813-15104438.pdf?src-supplier=Verical, ComponentLink1URL=https://datasheet.ciiva.com/15104/getdatasheetpartid-472813-15104438.pdf?src-supplier=Verical, ComponentLink2Description=https://datasheet.ciiva.com/31429/1692507-31429494.pdf?src-supplier=Farnell, ComponentLink2URL=https://datasheet.ciiva.com/31429/1692507-31429494.pdf?src-supplier=Farnell, ComponentLink3Description=https://datasheet.ciiva.com/1964/27024-1964843.pdf?src-supplier=Digi-Key, ComponentLink3URL=https://datasheet.ciiva.com/1964/27024-1964843.pdf?src-supplier=Digi-Key, Manufacturer Part Number=LT3751EFE#PBF, Max Supply Voltage=24V, Number of Outputs=1, Number of Pins=20, Packaging=Rail/Tube, Pricing 1="1=9.26000, 25=6.14640, 100=5.08200, 250=4.82792, 500=4.71900 (USD)", Radiation Hardening=No, REACH SVHC="No SVHC", RoHS=Yes, Stock 1=1231, Supplier 1=Digi-Key, Termination=SMD/SMT
U2: "N-Channel 150V 4.1A (Ta) 2.5W (Ta) Surface Mount 8-SOIC", Package=8-SOIC, Rating=150V, Digikey=FDS2582CT-ND, Digikey Link=https://www.digikey.com/product-detail/en/on-semiconductor/FDS2582/FDS2582CT-ND/3025307, MF="ON Semiconductor", MP=FDS2582, Price="0.98 CAD"

## Via types
v1: diameter 50, hole 28, Top Layer to Bottom Layer, 16 vias
v2: diameter 19.68, hole 7.87, Top Layer to Bottom Layer, 6 vias

## Nets (pads, with @x,y where several pads share a name; then routed paths per layer and width w, separated by ;. In a path a pad name is that pad's centre, name@x,y a point inside that pad or via, vN(x,y) a via of type N, cw(c..) or ccw(c..) an arc to the next point about the centre after c; other vN are vias at no path point)
+12V: C2.1 R9.2 R10.2 R11.2 R12.2 U1.13 U1.14
  other v1: 1455,2655 1455,3525
+24V: C1.2 C7.POS C8.1 C9.1 C10.1 R1.1 R7.2 R8.2 T1.7 T1.8 T1.9 T1.10
Charge: P1.1 U1.8 | length 796.8
  Top Layer w10: P1.1 1375,2925 1490,2810 1847.37,2810 1847.67,2810.3 1868.06,2810.3 U1.8
Done: P1.2 R11.1 U1.7 | length 1342.4
  Top Layer w10: R11.1 1312.5,3328 1268.75,3284.25 1268.75,3283.75 1240,3255 1125,3255 1050,3180 1050,3100 1120,3030 P1.2 1320,3025 1508.39,2836.61 U1.7
Fault: P1.3 R12.1 U1.6 | length 1341
  Top Layer w10: R12.1 1460,3285 1385,3210 1150,3210 1120,3180 P1.3 1175,3070 1325,3070 1535,2860 1847.84,2860 1850.04,2862.2 U1.6
GND: C2.2 C3.NEG C4.NEG C5.NEG C6.NEG C7.NEG C8.2 C9.2 C10.2 R4.2 R5.2 T1.1 U1.9 U1.10 U1.11 U1.21 | length 5875.9
  Top Layer w10: C2.2 2330,2945 2370,2985 2463,2985 R5.2
  Bottom Layer w15: C3.NEG 4453.15,4361.85 4770,4045 4770,3310 ; 4925,3335 4929.57,3339.57 C4.NEG ; 5115,3305 5108.79,3311.21 5108.79,3758.79 5399.57,4049.57 C5.NEG ; 5275,3320 5275,3730 5874.57,4329.57 C6.NEG
  other v1: 4135,3280 2700,3320
  other v2: 1958.35,2831.69 2001.65,2831.69 1958.35,2875 2001.65,2875 1958.35,2918.31 2001.65,2918.31
NetC1_1: C1.1 R6.1 | length 146
  Top Layer w15: C1.1 R6.1
NetD1_IN: D1.IN T1.12 | length 2988.9
  Top Layer w15: v1(2945,3390) 3074.8,3390 T1.12 ; v1(3590,4605) 3757.52,4605 D1.IN
  Bottom Layer w15: v1(2945,3390) 2865,3390 2810,3445 2810,3705 2685,3830 2425,3830 2335,3920 2335,4205 2536.65,4406.65 3391.65,4406.65 v1(3590,4605)
NetR1_2: R1.2 U1.1 | length 1593.1
  Top Layer w10: R1.2 1275,4023 1275,3850 1355,3770 1825,3770 1885,3710 1885,3290 1855,3260 1855,2991.9 1856.75,2990.16 U1.1
NetR2_1: R2.1 R3.1 R6.2 T1.3 T1.4 T1.5 T1.6 U2.D | length 567.6
  Top Layer w10: T1.6 4176.88,3978.28 T1.6@4196.88,3958.28
  Top Layer w15: R6.2 4005,4180 4136.92,4048.08 T1.6
NetR2_2: R2.2 U1.20 | length 1258.1
  Top Layer w10: U1.20 2109.96,2990.16 2111.85,2992.05 2112.05,2992.05 v1(2275,3155) ; v1(2810,3090) 2815,3090 2860,3045 R2.2@3228,3045 ; R2.2 R2.2@3228,3062.5
  Bottom Layer w10: v1(2275,3155) 2745,3155 v1(2810,3090)
NetR3_2: R3.2 U1.18 | length 1242.8
  Top Layer w10: U1.18 2133.98,2938.98 2255,3060 v1(2300,3060) ; v1(2765,3040) 2810,2995 3065,2995 3135,2925 R3.2
  Bottom Layer w10: v1(2300,3060) 2745,3060 v1(2765,3040)
NetR4_1: R4.1 U1.12 U2.S | length 644.7
  Top Layer w10: U1.12 2134.57,2785.43 2170,2750 v1(2240,2750) ; v1@2430,2755.5 v1(2430,2750) 2510,2750 2595,2835 R4.1 R4.1@2587.5,2913
  Bottom Layer w10: v1(2240,2750) v1(2430,2750)
NetR5_1: R5.1 U1.16 | length 576.9
  Top Layer w10: U1.16 2142.8,2887.8 v1(2205,2950) ; v1(2420,2825) 2425,2820 2460,2820 2500,2860 2500,2885.5 2472.5,2913 R5.1
  Bottom Layer w10: v1(2205,2950) 2290,2950 2415,2825 v1(2420,2825)
NetU1_15: U1.15 U2.G | length 942
  Top Layer w10: U1.15 2146.38,2862.2 2169.18,2885 v1(2220,2885) ; v1(2635,2685) U2.G
  Bottom Layer w10: v1(2220,2885) 2220,2805 2190,2775 2190,2725 2230,2685 v1(2635,2685)
OVLO1: R8.1 U1.3 | length 1787.3
  Top Layer w10: R8.1 1075,3875 1235,3715 1800,3715 1840,3675 1840,3330 1800,3290 1800,2990.04 1851.06,2938.98 U1.3
OVLO2: R10.1 U1.5 | length 603.5
  Top Layer w10: R10.1 1590,3085 1787.2,2887.8 U1.5
UVLO1: R7.1 U1.2 | length 1696.4
  Top Layer w10: R7.1 1175,3860 1290,3745 1805,3745 1865,3685 1865,3320 1825,3280 1825,2990 1850.43,2964.57 U1.2
UVLO2: R9.1 U1.4 | length 512.7
  Top Layer w10: R9.1 1720,3000 1806.61,2913.39 U1.4
V+: C3.POS C4.POS C5.POS C6.POS D1.OUT | length 2488
  Top Layer w15: D1.OUT 4130.59,4605.59 4255,4730 4525,4730 C3.POS 4775,4605 4910,4740 4993.43,4740 C4.POS 5242,4607 5375,4740 5463.43,4740 C5.POS 5722,4607 5855,4740 5938.43,4740 C6.POS
pads on no net: T1.2 T1.11 U1.17 U1.19

## Polygon pours and split planes (outlines as drawn)
NetR2_1 on Top Layer "NETR2_1_L01_P038" (solid, pour order 38): 4325,2825 4600,2825 4600,4100 4325,4100
GND on Top Layer "GND_L01_P037" (solid, pour order 37): 4020,3450 4250,3450 4250,3215 4020,3215
GND on Top Layer "GND_L01_P034" (solid, pour order 34): 2650,2965 2400,2965 2395,2970 2400,2975 2400,3250 2650,3250
GND on Top Layer "GND_L01_P033" (solid, pour order 33): 2830,3560 2830,3250 2050,3250 2050,3560
NetR4_1 on Top Layer "NETR4_1_L01_P031" (solid, pour order 31): 2550,2950 2550,2870 2725,2870 2725,2705 2850,2705 2850,2950
+12V on Top Layer "+12V_L01_P030" (solid, pour order 30): 2285,2845 2060,2845 2060,2800 2285,2800
no net on Top Layer "NONET_L01_P029" (solid, pour order 29): 2055,2850
+12V on Top Layer "+12V_L01_P028" (solid, pour order 28): 2285,2845 2375,2845 2375,2595 2285,2595
NetR2_1 on Top Layer "NETR2_1_L01_P026" (solid, pour order 26): 3465,2850 3075,2850 3075,2630 3260,2630 3465,2630
no net on Top Layer "NONET_L01_P025" (solid, pour order 25): 3265,2825
NetR2_1 on Top Layer "NETR2_1_L01_P024" (solid, pour order 24): 2985,2880 2985,2630 3075,2630 3075,2880
NetR2_1 on Top Layer "NETR2_1_L01_P023" (solid, pour order 23): 3265,3125 4325,3125 4325,2825 3265,2825
NetR2_1 on Top Layer "NETR2_1_L01_P022" (solid, pour order 22): 4050,3565 4055,3570 4325,3570 4325,4100 4050,4100
+12V on Top Layer "+12V_L01_P020" (solid, pour order 20): 1325,2700 1330,2700 2365,2700 2365,2595 2275,2595 1325,2595
GND on Top Layer "GND_L01_P019" (solid, pour order 19): 1820,2795 1980,2795 1980,2770 2125,2770 2125,2730 2120,2735 1820,2735
GND on Top Layer "GND_L01_P016" (solid, pour order 16): 1910,2735 1910,3560 2050,3560 2050,2735
GND on Top Layer "GND_L01_P015" (solid, pour order 15): 1680,4025 2450,4025 2450,4050 2830,4050 2830,3560 2815,3560 1910,3560 1910,3805 1675,3805
+12V on Top Layer "+12V_L01_P012" (solid, pour order 12): 1185,3680 1185,3365 1810,3365 1810,3680
+24V on Top Layer "+24V" (solid, pour order 0): 1000,5005 1005,5000 3490,5000 3490,3550 2890,3550 2890,4045 2870,4065 1000,4065
GND on Bottom Layer "GND_L02_P035" (solid, pour order 35): 2650,3355 2650,3190 5305,3190 5305,3355
+12V on Bottom Layer "+12V_L02_P014" (solid, pour order 14): 1325,3585 1585,3585 1585,2595 1325,2595